# Altium PCB ATmega_3000.14.PcbDoc
Units mm, origin at the board's own origin, x right, y up, seen from the top; angles counter-clockwise.
Board outline 50.04 x 60.07 mm, 4 copper layers (Top Layer, Signal Layer 1, Signal Layer 2, Bottom Layer), stack 0.778 mm thick; 78 components, 59 nets, 264 pads, 69 vias.
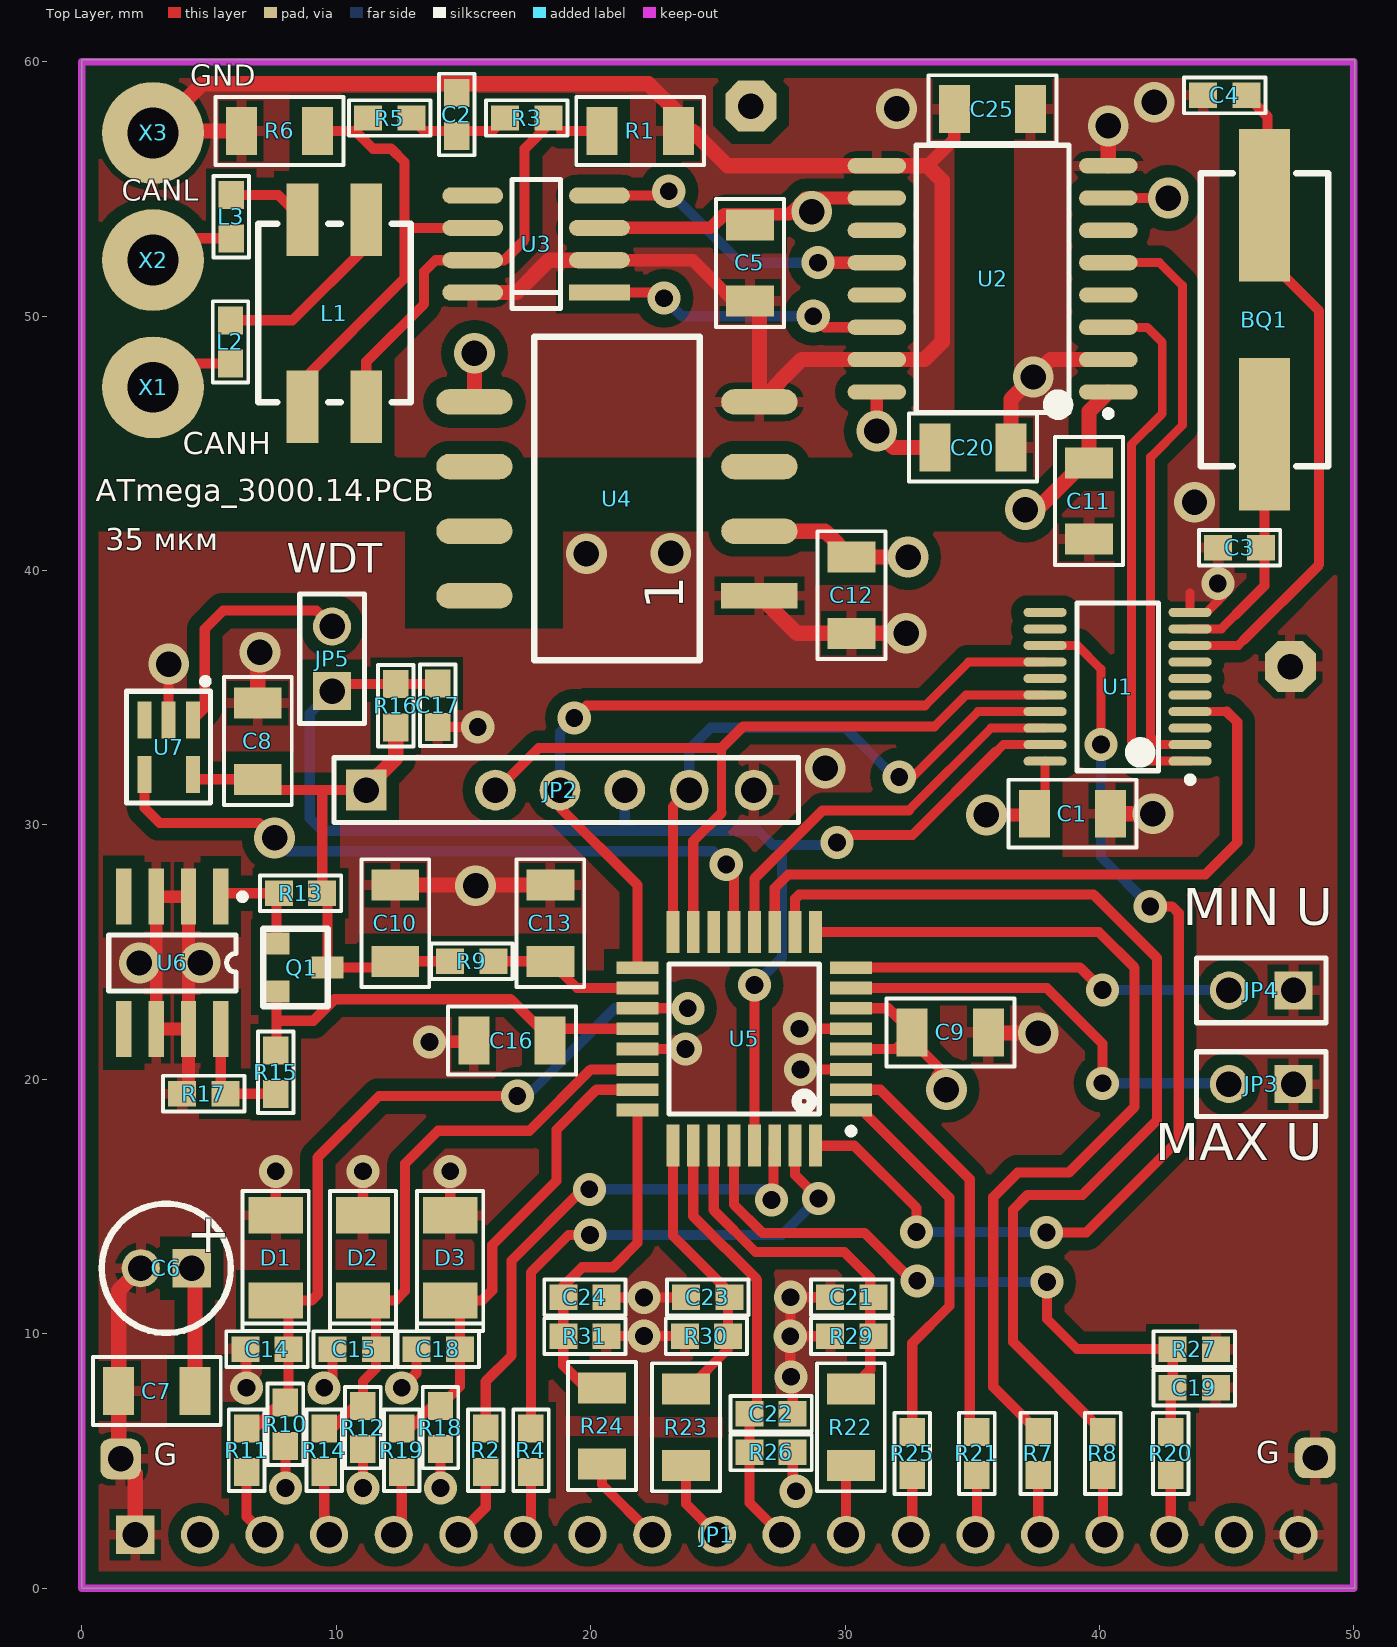
[diagram p0: Top Layer view]
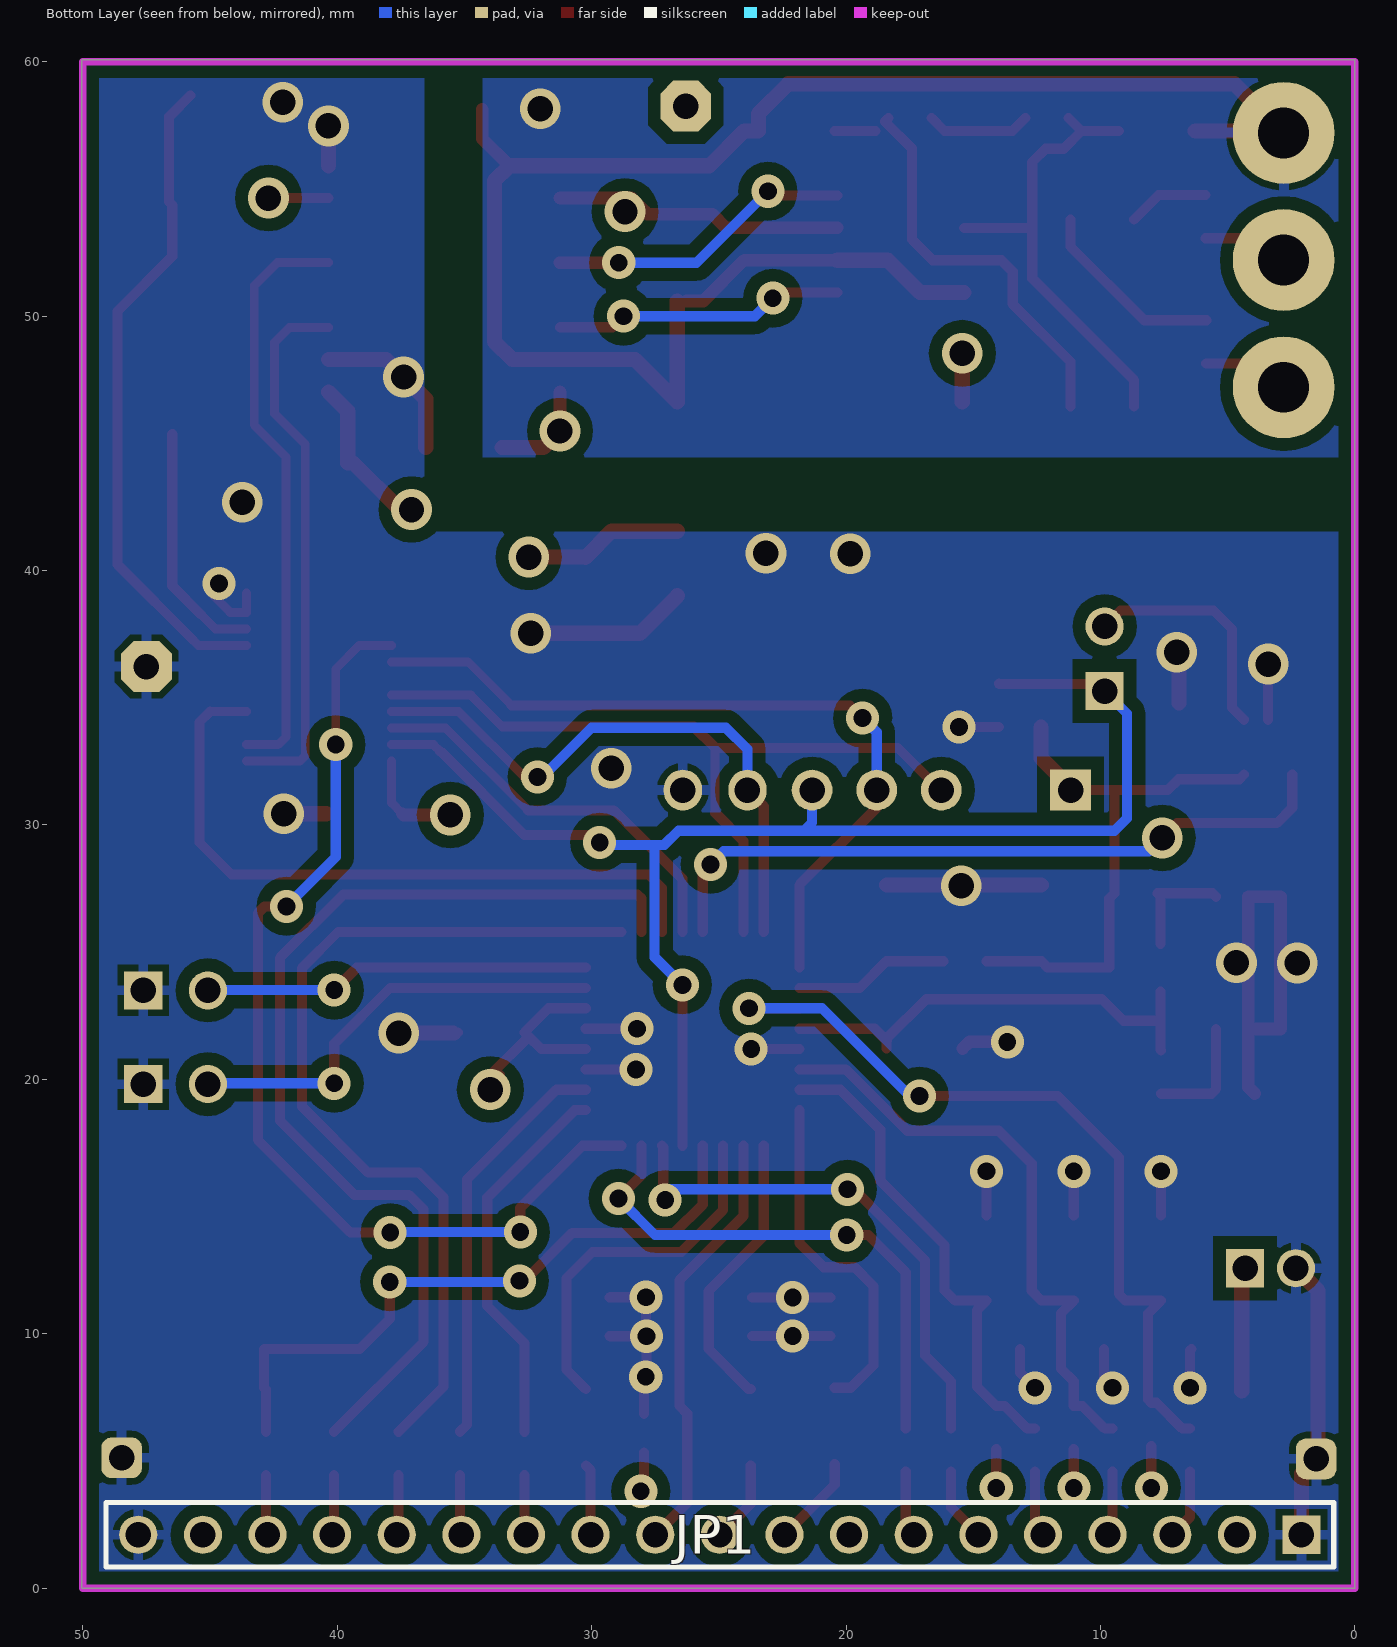
[diagram p1: Bottom Layer view, seen from below]
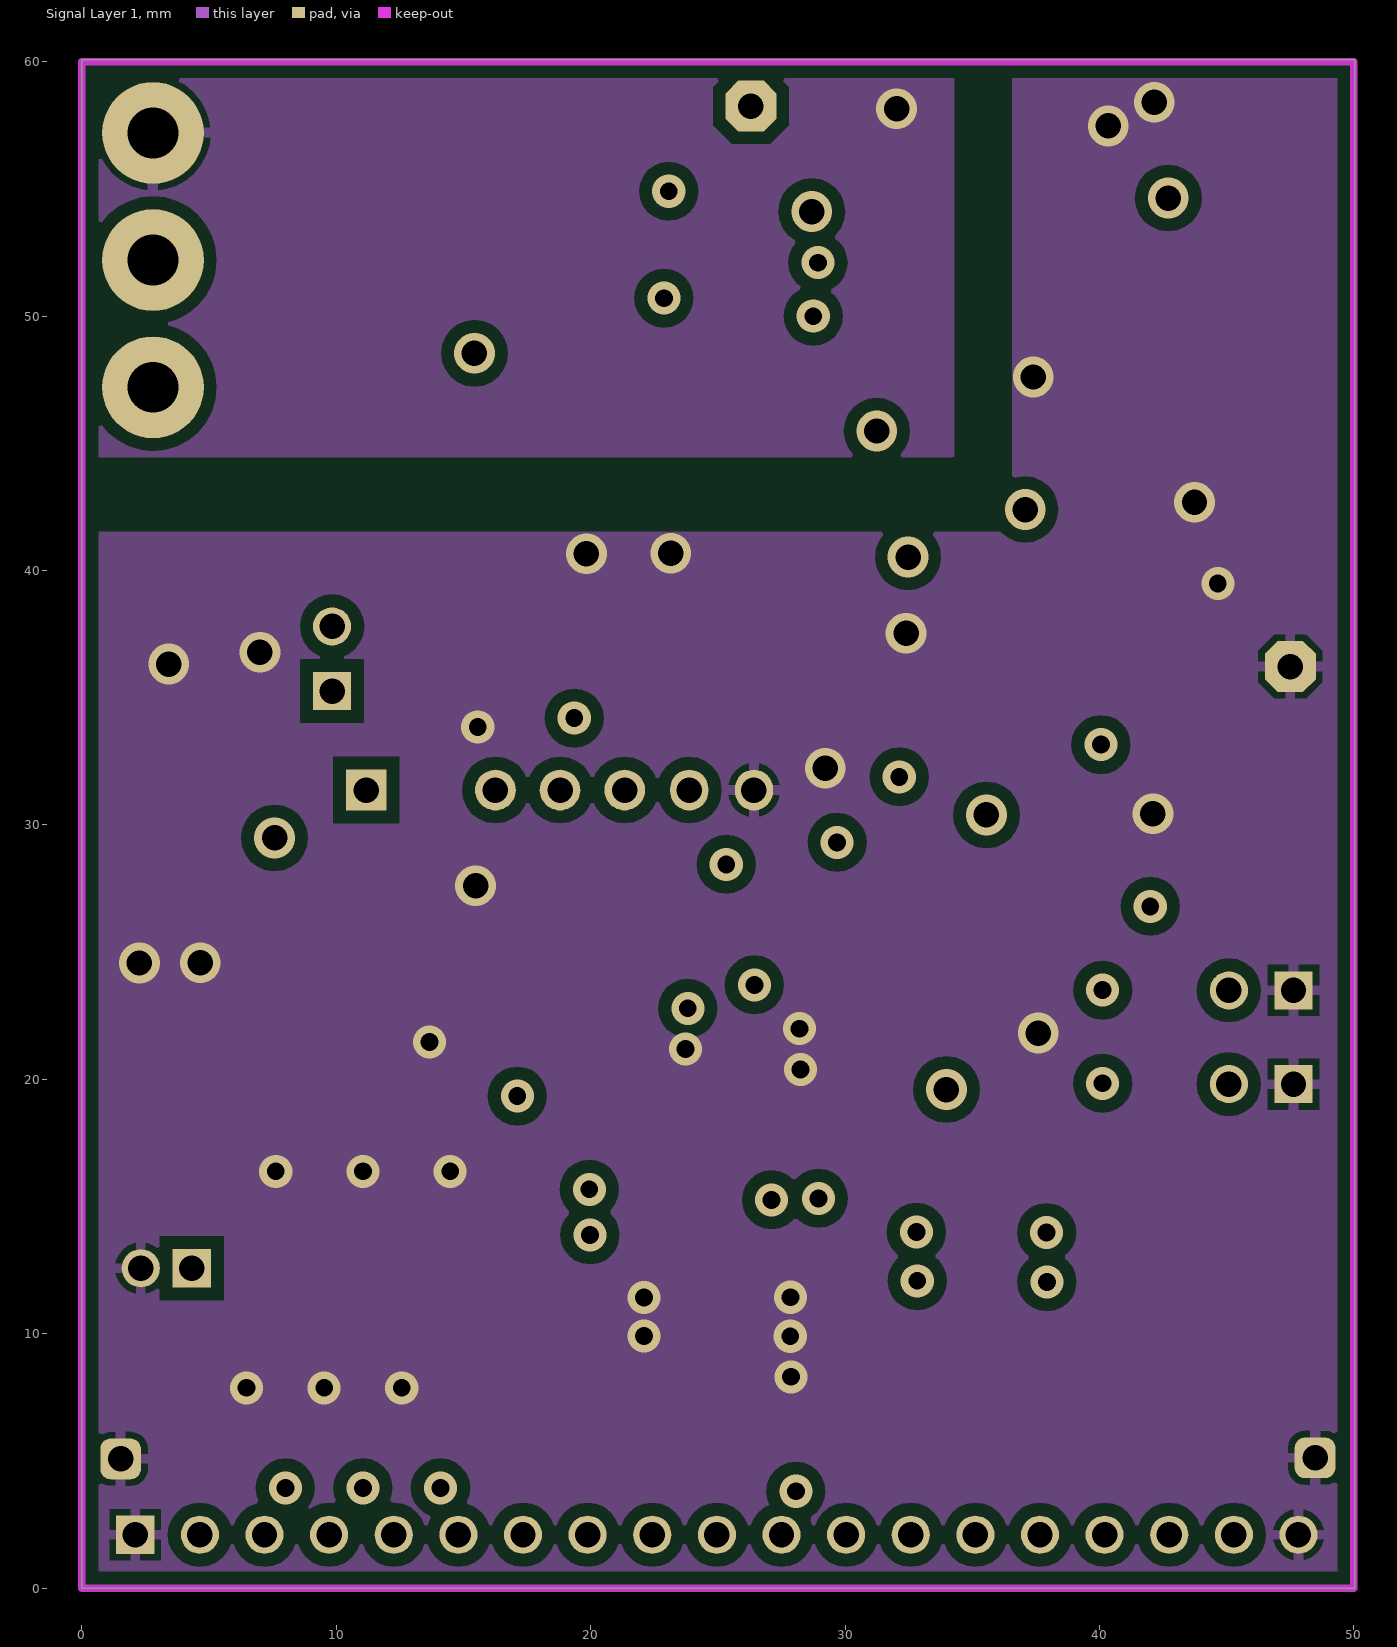
[diagram p2: Signal Layer 1]
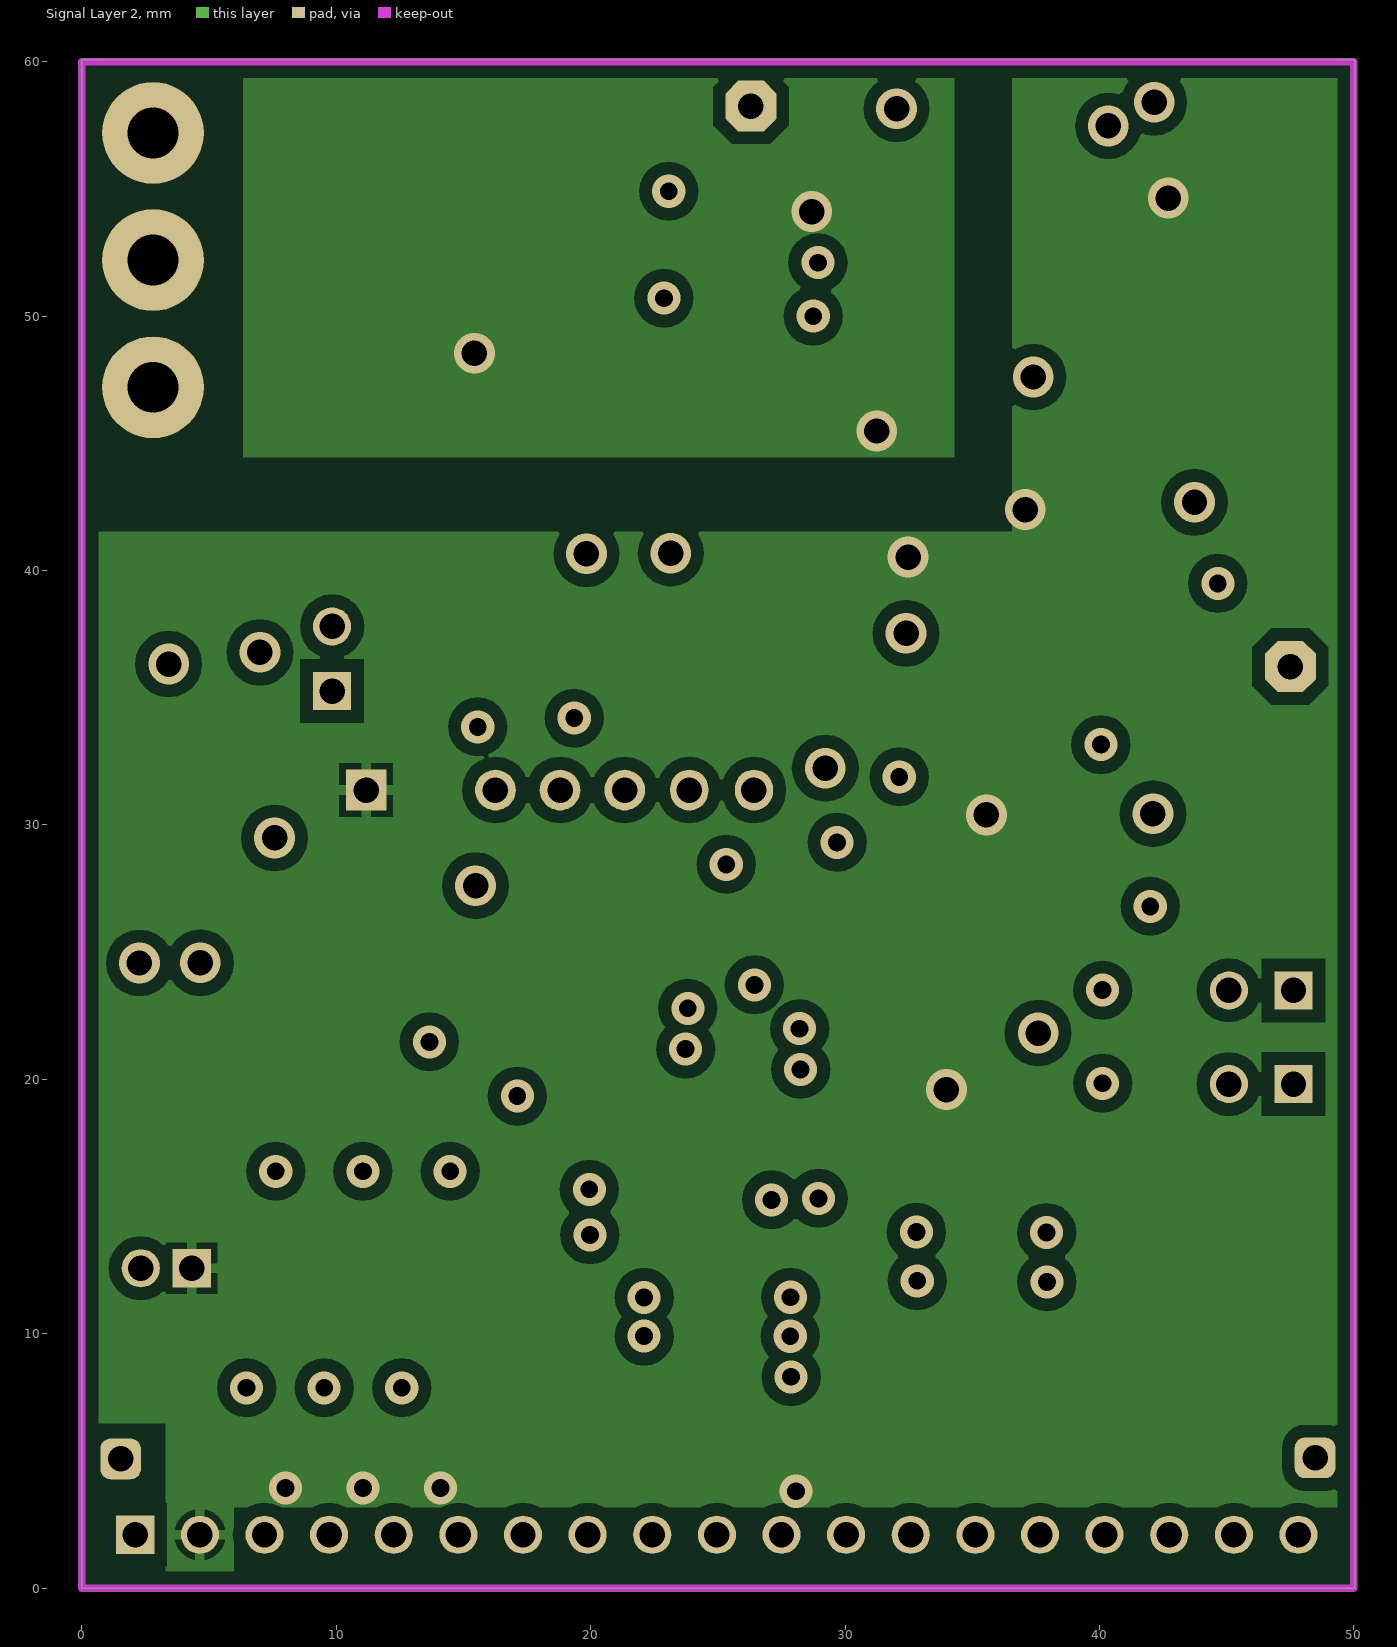
[diagram p3: Signal Layer 2]

## Layer stack, top to bottom
Top Solder: solder mask 0.0102, Solder Resist, Dk 3.5
Top Layer: signal copper 0.0356
Dielectric 1: core 0.254, FR-4, Dk 4.2
Signal Layer 1: signal copper 0.036
Dielectric 3: prepreg 0.127, Dk 4.2
Signal Layer 2: signal copper 0.036
Dielectric 2: core 0.254, Dk 4.2
Bottom Layer: signal copper 0.0356
Bottom Solder: solder mask 0.0102, Solder Resist, Dk 3.5

## Board outline
0,0 50.038,0 50.038,60.071 0,60.071

## Design rules (kind name [scope] priority, off if disabled: settings)
Clearance Polygon [All vs InPolygon] p1: gap=0.5 ignorepadtopadclearanceinfootprint=FALSE
Clearance keep [All] p2: gap=0.3 ignorepadtopadclearanceinfootprint=TRUE
Clearance "S2 Layer" [All vs OnLayer('Signal Layer 2')] p3: gap=0.4 ignorepadtopadclearanceinfootprint=TRUE
Clearance "S1 Layer" [All vs OnLayer('Signal Layer 1')] p4: gap=0.4 ignorepadtopadclearanceinfootprint=TRUE
Clearance [All] p5: gap=0.254 ignorepadtopadclearanceinfootprint=TRUE except(0: Arc-Hole Track-Hole SMDPad-Hole THPad-Hole Via-Hole Fill-Hole Poly-Hole Region-Hole Text-Hole)
Height [All] p1 off: minheight=0 maxheight=25.4 prefheight=12.7
HoleSize [All] p1: absolutevalues=TRUE maxlimit=10 minlimit=0.025 maxpercent=80.000 minpercent=20.000
MinimumSolderMaskSliver [All] p1: minsoldermaskwidth=0.1
PolygonConnect [All] p1: thpad.connectstyle=Relief thpad.reliefconductorwidth=0.4 thpad.reliefentries=4 thpad.polygonreliefangle="90 Angle" thpad.airgapwidth=0.254 smdpad.connectstyle=Relief smdpad.reliefconductorwidth=0.4 smdpad.reliefentries=4 smdpad.polygonreliefangle="90 Angle" smdpad.airgapwidth=0.254 via.connectstyle=Direct via.reliefconductorwidth=0.4 via.reliefentries=4 via.polygonreliefangle="90 Angle" via.airgapwidth=0.254
RoomDefinition "ПУ БПС3000 AtMega" [InComponentClass('ПУ БПС3000 AtMega')] p1 off: confinementstyle=ConfineIn formatcopy=TRUE lockcomponents=FALSE outline -49.403,-49.276 1.397,-49.276 1.397,-23.876 -49.403,-23.876
RoutingVias [All] p1: holewidth=1 width=1.5 viastyle="Through Hole" minholewidth=0.7 minwidth=1.3 maxholewidth=4 maxwidth=6
SilkToBoardRegionClearance [All] p1 off:
SilkToSilkClearance [All] p1 off: silktosilkclearance=0.254
SilkToSolderMaskClearance [IsPad] p1 off: minsilkscreentomaskgap=0.254 clearancetoexposedcopper=TRUE
SolderMaskExpansion Via [IsVia] p1: expansion=0.05
SolderMaskExpansion [All] p2: expansion=0.102
Width [All] p1: maxlimit=5 minlimit=0.254 preferedwidth=0.5
24 further rules are at their usual default settings.

## Components (designator, comment, footprint, x,y, rotation, side; value= is the part's Value field where it differs from the comment)
BQ1 "10МГц" HC-49SMD 46.482,49.856 r90 top
C1 "22.0" C_1206 40.434,30.439 r180 top value=1u
C2 "100n" 0603 14.739,57.923 r90 top value=1,0
C3 "10p" 0603 45.505,40.894 r0 top
C4 "10p" 0603 44.919,58.674 r0 top
C5 "22.0" _1206 26.259,53.587 r270 top value=1,0
C6 "22.0x50" C_5d_2pad 2.318,12.573 r0 top value=22,0
C7 "22.0" _1206 1.448,7.747 r0 top value=1,0
C8 "22.0" _1206 6.917,34.79 r270 top value=1,0
C9 "22.0" _1206 35.636,21.844 r180 top value=1,0
C10 "22.0" _1206 12.319,24.638 r90 top value=1,0
C11 "22.0" _1206 39.585,44.226 r270 top value=1,0
C12 "22.0" _1206 30.252,37.53 r90 top value=1,0
C13 "22.0" _1206 18.415,27.635 r270 top value=1,0
C14 "1u" 0603 7.278,9.398 r0 top value=1,0
C15 "1u" 0603 10.707,9.398 r0 top value=1,0
C16 "22.0" _1206 15.406,21.522 r0 top value=1,0
C17 "1u" 0603 13.991,34.701 r90 top value=1,0
C18 "1u" 0603 14.009,9.398 r0 top value=1,0
C19 "1u" 0603 43.727,7.874 r180 top value=1,0
C20 "1n 1000v" _1206 33.528,44.831 r0 top value=1,0
C21 "1u" 0603 30.265,11.43 r0 top value=1,0
C22 "1u" 0603 27.09,6.858 r180 top value=1,0
C23 "1u" 0603 24.599,11.43 r0 top value=1,0
C24 "1u" 0603 19.773,11.43 r180 top value=1,0
C25 "1n 1000v" _1206 34.295,58.133 r0 top value=1,0
D1 "C5v6" SM/D_1406 7.62,11.303 r90 top value=BZV55C5V6
D2 "C5v6" SM/D_1406 11.049,11.303 r90 top value=BZV55C5V6
D3 "C5v6" SM/D_1406 14.478,11.303 r90 top value=BZV55C5V6
JP1 "PLSR19" HDR1X19 2.1,2.1 r0 top locked
JP2 "PLSF-7" HDR1X7 11.176,31.369 r0 top
JP3 "JMP" HDR1X2#1 46.355,19.812 r180 top
JP4 "JMP" HDR1X2#1 46.355,23.495 r180 top
JP5 "PLS2" HDR1X2#2 9.836,35.261 r90 top
L1 "B82790C0475N265" B82790 9.927,50.12 r90 top
L2 "DR" 0603 5.842,48.983 r270 top value=BLM18AG121SN10
L3 "DR" 0603 5.875,53.906 r270 top value=BLM18AG121SN10
Q1 "BC847" SOT23 8.649,24.391 r270 top
R1 "CT1206K14G" 1206 20.447,57.277 r0 top
R2 "1K0" 0603 15.875,5.422 r90 top value=1K
R3 "680R" 0603 17.487,57.785 r180 top value=120
R4 "1K0" 0603 17.653,5.422 r90 top value=1K
R5 "680R" 0603 12.104,57.785 r180 top value=120
R6 "CT1206K14G" 1206 6.274,57.277 r0 top
R7 "100R" 0603 37.592,5.295 r270 top value=10K
R8 "100R" 0603 40.132,5.295 r270 top value=10K
R9 "100R" 0603 15.328,24.638 r0 top value=10K
R10 "1K0" 0603 8.001,6.438 r90 top value=10K
R11 "100R" 0603 6.477,5.422 r270 top
R12 "1K0" 0603 11.049,6.311 r90 top value=10K
R13 "1K0" 0603 8.597,27.312 r180 top value=1K
R14 "100R" 0603 9.525,5.422 r270 top
R15 "1K0" 0603 7.62,20.281 r90 top value=1K
R16 "10K" 0603 12.341,34.685 r90 top
R17 "1K8" 0603 4.787,19.438 r0 top value=1K
R18 "1K0" 0603 14.097,6.311 r90 top value=10K
R19 "100R" 0603 12.573,5.422 r270 top
R20 "2K0" 0603 42.799,5.295 r270 top value=1K
R21 "1R0" 0603 35.179,5.295 r270 top value=1K
R22 "33K" 1206 30.226,4.826 r90 top value=value
R23 "33K" 1206 23.749,4.826 r90 top value=value
R24 "100R" 1206 20.447,4.877 r90 top value=value
R25 "1R0" 0603 32.639,5.295 r270 top value=15K
R26 "2K0" 0603 27.09,5.334 r0 top value=1K
R27 "2K0" 0603 43.727,9.398 r180 top value=1K
R29 "1K5" 0603 30.265,9.906 r0 top value=1K
R30 "1K5" 0603 24.55,9.906 r0 top value=1K
R31 "" 0603 19.773,9.906 r180 top value=1K
U1 "MCP2515" TSSOP-ST20_N 40.711,35.429 r180 top
U2 "ISO7231" DW16_N 40.346,47.018 r180 top
U3 "TJA1050" SOIC-8-1.27-L.200 20.345,50.927 r90 top
U4 "SBT01L-05" SBT01L 26.631,39.006 r90 top
U5 "ATmega168A-AU" 32A_N 26.035,21.59 r180 top
U6 "TL431ACD" SO-G8 3.556,24.574 r180 top
U7 "TPS3823-50" SO-G5/P.95 4.36,34.13 r180 top value=TPS76333
X1 "" PIN2R#1 2.875,46.85 r0 top locked
X2 "" PIN2R#2 2.875,52.05 r0 top locked
X3 "" PIN2R#3 2.7,56.925 r0 top locked

## Footprints (in the part's own frame and the unit in brackets; to place one, negate y for a bottom-side part, rotate by r counter-clockwise, add the part's x,y. Pads: shape width x height; smd on the part's side, far side on the other; paste and mask are expansions set on the pad)
32A_N [mm] "Thin QFP, 32-Leads, Body 7x7mm, Pitch 0.8mm, IPC Medium Density"
  rect 1.65x0.5 smd mask+0.05: 1(-4.2,2.8) 2(-4.2,2) 3(-4.2,1.2) 4(-4.2,0.4) 5(-4.2,-0.4) 6(-4.2,-1.2) 7(-4.2,-2) 8(-4.2,-2.8) 17(4.2,-2.8) 18(4.2,-2) 19(4.2,-1.2) 20(4.2,-0.4) 21(4.2,0.4) 22(4.2,1.2) 23(4.2,2) 24(4.2,2.8)
  rect 0.5x1.65 smd mask+0.05: 9(-2.8,-4.2) 10(-2,-4.2) 11(-1.2,-4.2) 12(-0.4,-4.2) 13(0.4,-4.2) 14(1.2,-4.2) 15(2,-4.2) 16(2.8,-4.2) 25(2.8,4.2) 26(2,4.2) 27(1.2,4.2) 28(0.4,4.2) 29(-0.4,4.2) 30(-1.2,4.2) 31(-2,4.2) 32(-2.8,4.2)
  silkscreen extent -4.33,-2.95 2.95,3.75, body extent -3.5,-3.5 3.5,3.5, height 1.2
0603 [mm] "Chip Capacitor; Body 1.6 x 0.8 mm (LxW typ)"
  rect 1.1x1 smd: 1(-0.85,0) 2(0.85,0)
  silkscreen extent -1.6,-0.7 1.6,0.7
1206 [mil]
  rect 48x74 smd: 1(0,0) 2(118,0)
  silkscreen extent -40,-52 158,52
_1206 [mil]
  rect 48x74 smd: 1(0,0) 2(118,0)
  silkscreen extent -40,-53 158,53
B82790 [mm] "Фильтр EPCOS"
  rect 2.85x1.25 smd: 1(-3.675,-1.25) 2(-3.675,1.25) 3(3.675,1.25) 4(3.675,-1.25)
  silkscreen extent -3.5,-3 3.5,3
C_5d_2pad [mm]
  rect 1.5x1.5 hole 1: +(2,0)
  round 1.5 hole 1: -(0,0)
  silkscreen extent -1.54,-2.54 3.54,2.54
C_1206 [mil]
  rect 48x74 smd: 1(0,0) 2(118,0)
  silkscreen extent -40,-53 158,53
DW16_N [mm]
  oval 2.3x0.6 smd: 1(0,0) 2(0,-1.27) 3(0,-2.54) 4(0,-3.81) 5(0,-5.08) 6(0,-6.35) 7(0,-7.62) 8(0,-8.89) 9(9.1,-8.89) 10(9.1,-7.62) 11(9.1,-6.35) 12(9.1,-5.08) 13(9.1,-3.81) 14(9.1,-2.54) 15(9.1,-1.27) 16(9.1,0)
  silkscreen extent -0.13,-9.69 7.55,0.97, body extent 0.75,-9.69 8.34,0.8, height 2.64
HC-49SMD [mm]
  rect 6x2 smd: 1(-4.5,0) 2(4.5,0)
  silkscreen extent -5.75,-2.5 5.75,2.5
HDR1X2#1 [mm]
  rect 1.5x1.5 hole 1: 1(-1.27,0)
  round 1.5 hole 1: 2(1.27,0)
  silkscreen extent -2.54,-1.27 2.54,1.27
HDR1X2#2 [mm] "Connector; Header; 2 Position"
  rect 1.5x1.5 hole 1: 1(0,0)
  round 1.5 hole 1: 2(2.54,0)
  silkscreen extent -1.27,-1.27 3.81,1.27
HDR1X7 [mm]
  rect 1.6x1.6 hole 1: 1(0,0)
  round 1.6 hole 1: 3(5.08,0) 4(7.62,0) 5(10.16,0)
  oval 1.5x1.6 hole 1: 6(12.7,0) 7(15.24,0)
  silkscreen extent -1.27,-1.27 17,1.27
HDR1X19 [mm]
  rect 1.5x1.5 hole 1: 1(0,0)
  round 1.5 hole 1: 2(2.54,0) 3(5.08,0) 4(7.62,0) 5(10.16,0) 6(12.7,0) 7(15.24,0) 8(17.78,0) 9(20.32,0) 10(22.86,0) 11(25.4,0) 12(27.94,0) 13(30.48,0) 14(33.02,0) 15(35.56,0) 16(38.1,0) 17(40.64,0) 18(43.18,0) 19(45.72,0)
PIN2R#1 [mm]
  round 4 hole 2: 1(-0.075,0.35)
PIN2R#2 [mm]
  round 4 hole 2: 1(-0.075,0.15)
PIN2R#3 [mm]
  round 4 hole 2: 1(0.1,0.275)
SBT01L [mm] "Body7.5x15, pin2.54"
  rect 1x3 smd: 1(0,0)
  oval 1x3 smd: 2(2.54,0) 3(5.08,0) 4(7.62,0) 5(7.62,11.2) 6(5.08,11.2) 7(2.54,11.2) 8(0,11.2)
  silkscreen extent -2.54,2.35 10.18,8.85
SM/D_1406 [mil]
  rect 56x84 smd: +(132,0) -(0,0)
  silkscreen extent -47,-51 169,51
SO-G5/P.95 [mm]
  rect 0.55x1.45 smd: 1(0,0) 2(0.95,0) 3(1.9,0) 4(1.9,2.15) 5(0,2.15)
  silkscreen extent -0.7,-1.64 2.6,3.27
SO-G8 [mm]
  rect 0.6x2.2 smd: 1(-1.905,-2.604) 2(-0.635,-2.604) 3(0.635,-2.604) 4(1.905,-2.604) 5(1.905,2.596) 6(0.635,2.596) 7(-0.635,2.596) 8(-1.905,2.596)
  silkscreen extent -2.88,-2.73 2.5,1.1
SOIC-8-1.27-L.200 [mil]
  rect 25x94 smd: 1(0,0)
  oval 25x94 smd: 2(50,0) 3(100,0) 4(150,0) 5(150,196) 6(100,196) 7(50,196) 8(0,196)
  silkscreen extent -25,60 175,136
SOT23 [mil]
  rect 34x40 smd: 1(-37,-39.5) 3(37,-39.5)
  rect 34x50 smd: 2(0,39.5)
  silkscreen extent -60,-60 60,40
TSSOP-ST20_N [mm] "TSOP, 20-Leads, Body 6.5x4.4mm, Pitch 0.65mm, IPC Medium Density"
  oval 1.7x0.35 smd mask+0.05: 1(-2.85,2.925) 2(-2.85,2.275) 3(-2.85,1.625) 4(-2.85,0.975) 5(-2.85,0.325) 6(-2.85,-0.325) 7(-2.85,-0.975) 8(-2.85,-1.625) 9(-2.85,-2.275) 10(-2.85,-2.925) 11(2.85,-2.925) 12(2.85,-2.275) 13(2.85,-1.625) 14(2.85,-0.975) 15(2.85,-0.325) 16(2.85,0.325) 17(2.85,0.975) 18(2.85,1.625) 19(2.85,2.275) 20(2.85,2.925)
  silkscreen extent -2.98,-3.3 1.6,3.77, body extent -2.25,-3.3 2.25,3.3, height 1.2

## Part data
BQ1: library part BQ, Bottom=20, Right=20
C1 C3 C4: library part C_SM_1206
C2 C5 C7 C8 C9 C10 C11 C12 C13 C14 C15 C16 C17 C18 C19 C20 C21 C22 C23 C24 C25: library part "Cap Semi", "Capacitor (Semiconductor SIM Model)", Manufacturer="Generic Components", Class I=Passive, Class II=Capacitor, Published=8-Jun-2000, Publisher="Altium Limited", Revision="July-2002: Re-released for DXP Platform."
C6: library part "Cap Pol1", "Polarized Capacitor (Radial)", Manufacturer="Generic Components", Class I=Passive, Class II=Capacitor, Published=8-Jun-2000, Publisher="Altium Limited", Revision="July-2002: Re-released for DXP Platform."
D1 D2 D3: library part Zener, "Default Diode", Manufacturer="Generic Components", Class I=Discrete, Class II="Diode - Switching", Published=8-Jun-2000, Publisher="Altium Limited", Revision="July-2002: Re-released for DXP Platform."
JP1: library part "Header 19", "Header, 19-Pin", Manufacturer="Generic Components", Class I=Connector, Publisher="Altium Limited", Revision="July-2002: Re-released for DXP Platform."
JP5: library part "Header 2", "Header, 2-Pin", Manufacturer="Generic Components", Class I=Connector, Publisher="Altium Limited", Revision="July-2002: Re-released for DXP Platform."
L1: library part "Trans Cupl", "Transformer (Coupled Inductor Model)", LatestRevisionDate=17-Jul-2002, LatestRevisionNote="Re-released for DXP Platform.", PackageDescription="Transformer; 4 Leads", PackageReference=TRF_4, Published=8-Jun-2000, Publisher="Altium Limited"
L2 L3: "L"
Q1: library part BC847ALT1, "General Purpose Transistor NPN Silicon", Manufacturer=Motorola, Package Information="Latest Revision: 1997", Package Reference=318-08, Class I=Discrete, Class II="BJT - Low Power", Datasheet="Latest Revision: 1997", Published=29-Sep-2000, Publisher="Altium Limited", Revision="July-2002: Re-released for DXP Platform."
R1 R6: library part "Res Varistor", "Varistor (Voltage-Sensitive Resistor)", Manufacturer="Generic Components", Class I=Discrete, Class II="Voltage-Sensitive Resistor", Published=24-Mar-1999, Publisher="Altium Limited", Revision="July-2002: Re-released for DXP Platform."
R2 R3 R4 R5 R7 R8 R9 R10 R11 R12 R13 R14 R15 R16 R17 R18 R19 R20 R21 R25 R26 R27 R29 R30 R31: library part Res2, "Resistor", Manufacturer="Generic Components", Class I=Passive, Class II=Resistor, Published=8-Jun-2000, Publisher="Altium Limited", Revision="July-2002: Re-released for DXP Platform."
  R2 R4 R7 R8 R9 R10 R11 R12 R14 R16 R18 R19 R20 R21 R25 R26 R27 R29 R30 R31: Rule=Undefined
R22 R23 R24: library part R_1206
U1: "Stand-Alone CAN Controller With SPI Interface, 20-Pin TSSOP, Industrial Temperature", Code_JEDEC=MO-153-AC, ComponentLink1Description="Manufacturer URL", ComponentLink1URL=http://www.microchip.com/, ComponentLink2Description=Datasheet, ComponentLink2URL=http://ww1.microchip.com/downloads/en/DeviceDoc/21801f.pdf, ComponentLink3Description="Package Specification", ComponentLink3URL=http://www.microchip.com/stellent/groups/techpub_sg/documents/packagingspec/en012702.pdf, DatasheetVersion="revF, Oct-2010", PackageDescription="20-Lead Plastic Thin Shrink Small Outline (ST) - 4.4mm Body [TSSOP]", PackageReference=TSSOP-ST20, PackageVersion="revBB, Aug-2009"
U4: library part SBT01L
U5: "8-bit AVR Microcontroller, 16KB Flash, 512 Bytes EEPROM, 1KB SRAM, 32-pin TQFP, Industrial Grade (-40°C to 85°C)", Supplier Part Number 1=ATMEGA168A-AU-ND, Code_JEDEC=MS-026-ABA, ComponentLink1Description="Manufacturer Link", ComponentLink1URL=http://www.atmel.com/products/avr/default.asp?, ComponentLink2Description="ATmega48A/48PA/88A/88PA/168A/168PA/328/328P Datasheet", ComponentLink2URL=http://www.atmel.com/dyn/resources/prod_documents/8271.pdf, ComponentLink3Description="ATmega48A/48PA/88A/88PA/168A/168PA/328/328P Summary", ComponentLink3URL=http://www.atmel.com/dyn/resources/prod_documents/8271S.pdf, ComponentLink4Description="Atmel.com Home", ComponentLink4URL=http://www.atmel.com, DatasheetVersion="revA, Jan-2010", PackageDescription="32-Lead, 7x7x1.0 mm Body, 0.8mm Lead Pitch, Thin Profile Plastic Quad Flat Package (TQFP)", PackageReference=32A, PackageVersion="revB, Oct-2001", Published=1-Apr-2010, Publisher="Altium Limited", Supplier 1=Digi-Key, Supplier 2=Mouser, Supplier Part Number 2=556-ATMEGA168A-AU
U6: "Programmable Precision Reference", Manufacturer=Motorola, Package Reference=751-02, Class I="Power Management", Class II="Voltage Reference", Datasheet="Linear and Interface Integrated Circuits, DL128 Rev2 (1988)", Published=15-Apr-2002, Publisher="Altium Limited"
U7: library part TPS3823, "Reset IC", Manufacturer="National Semiconductor", Package Information="Latest Revision: Aug-1999", Package Reference=MA05B, Class I="Power Management", Class II="Voltage Regulator", Datasheet="Latest Revision: Oct-1999", Published=15-Apr-2002, Publisher="Altium Limited"
X1 X2 X3: library part Socket_Ring, "Socket", Manufacturer="Generic Components", Class I=Connector, Publisher="Altium Limited", Revision="July-2002: Re-released for DXP Platform."
JP2: Bottom=80, Right=20

## Free pads (board coordinates)
  oct 2x2 hole 1: 0(26.3,58.25) 1(47.5,36.225)
  rrect50% 1.6x1.6 hole 1: 1(1.524,5.08) 1(48.472,5.124)

## Via types
v1: diameter 1.3, hole 0.7, Top Layer to Bottom Layer, 44 vias
v2: diameter 1.6, hole 1, Top Layer to Bottom Layer, 25 vias

## Nets (pads, with @x,y where several pads share a name; then routed paths per layer and width w, separated by ;. In a path a pad name is that pad's centre, name@x,y a point inside that pad or via, vN(x,y) a via of type N, cw(c..) or ccw(c..) an arc to the next point about the centre after c; other vN are vias at no path point)
+5v: C1.2 C6.+ C7.2 C8.2 C9.2 C10.1 C11.1 C12.2 JP1.2 JP2.1 Q1.2 R9.1 R10.1 R12.1 R13.1 R16.1 R18.1 R26.2 U1.20 U2.1 U2.7 U4.2 U5.4 U5.6 U7.5 | length 60.7
  Top Layer w0.35: C1.2 37.861,30.863 U1.20
  Top Layer w0.4: U7.5 4.547,31.793 C8.2 ; C8.2@6.927,31.798 7.356,31.369 JP2.1@11.078,31.369 ; v1(8.001,3.937) R10.1 ; 9.447,31.346 R13.1 9.652,27.107 Q1.2 12.072,24.391 C10.1 R9.1 ; v1(11.049,3.937) R12.1 ; JP2.1@11.137,31.428 JP2.1@11.078,31.369 ; JP2.1 JP2.1@11.078,31.369 ; v1(14.097,3.937) R18.1 ; R26.2 27.94,3.937 v1(28.067,3.81) ; U5.4 31.985,21.19 C9.2@32.473,21.678 ; U5.6 31.693,22.79 C9.2 C9.2@32.473,21.678 ; v2@33.601,19.596 v2@33.601,20.168 ; v2@33.982,20.168 C9.2@32.473,21.678 ; U2.1 U2.1@40.372,46.992 ; U2.7 v2(42.704,54.638)
  Top Layer w0.5: v2(35.555,30.393) 37.391,30.393 C1.2
  Top Layer w0.6: C6.+ 4.445,12.446 C7.2 ; JP2.1@11.137,31.428 12.341,32.632 R16.1 ; U4.2 29.212,41.546 30.241,40.516 C12.2 v2(32.475,40.527) ; v2(37.08,42.396) 37.541,42.396 39.371,44.226 C11.1 39.585,46.258 U2.1
  Bottom Layer w0.4: v2(42.704,54.638) v2@42.794,54.549
  other v2: 33.982,19.596
adc0: C18.2 D3.- R18.2 R19.1 U5.23 | length 19.5
  Top Layer w0.4: R19.1 12.876,6.272 13.765,7.161 R18.2 14.859,7.923 C18.2 14.859,10.922 D3.- 15.719,11.303 16.129,11.713 16.129,13.485 18.656,16.012 18.656,18.021 20.225,19.59 U5.23
adc1: C24.2 R24.2 R31.2 U5.24 | length 13.8
  Top Layer w0.4: R24.2 19.812,7.874 18.923,8.763 R31.2 C24.2 18.923,11.871 19.663,12.611 20.881,12.611 21.835,13.565 U5.24
adc2: C23.2 R23.2 R30.2 U5.25 | length 11.2
  Top Layer w0.4: U5.25 23.235,13.849 25.4,11.684 R30.2 25.4,9.398 23.825,7.823 R23.2
adc3: C22.2 JP1.11 R26.1 U5.26 | length 17
  Top Layer w0.4: U5.26 24.035,14.624 26.543,12.116 26.543,7.161 C22.2 R26.1 26.24,3.36 JP1.11
adc4: C21.2 R22.2 R29.2 U5.27 | length 14.5
  Top Layer w0.4: U5.27 24.835,14.858 26.48,13.213 29.968,13.213 30.988,12.193 30.988,8.585 R22.2
adc5: C19.2 R20.1 R27.2 U5.28 | length 26.2
  Top Layer w0.4: U5.28 25.635,15.076 26.748,13.964 30.76,13.964 32.739,11.984 v1(32.836,12.081) ; v1(37.935,12.036) 37.935,10.578 39.115,9.398 R27.2 ; R20.1 42.799,7.796 C19.2 R27.2 ; R27.2@42.799,9.32 R27.2
  Bottom Layer w0.4: v1@32.859,12.002 32.893,12.036 v1(37.935,12.036)
adc6: C14.2 D1.- R10.2 R11.1 U5.19 | length 31.9
  Top Layer w0.4: R11.1 6.78,6.272 7.796,7.288 R10.2 8.128,7.415 C14.2 8.128,10.795 D1.- 9.017,11.303 9.271,11.557 9.271,16.933 11.681,19.343 v1(17.117,19.343) ; U5.19 v1(23.819,22.79)
  Bottom Layer w0.4: v1@17.498,19.343 20.946,22.79 v1(23.819,22.79)
adc7: C15.2 D2.- R12.2 R14.1 U5.22 | length 23.9
  Top Layer w0.4: R14.1 9.828,6.272 10.717,7.161 R12.2 11.049,8.128 11.557,8.636 C15.2 11.557,10.795 D2.- 12.319,11.303 12.7,11.684 12.7,16.679 13.997,17.976 17.595,17.976 20.009,20.39 U5.22
adc-0: JP1.17 R20.2 | length 2.4
  Top Layer w0.4: JP1.17 42.799,2.159 R20.2
bps_en: R21.1 U5.2 | length 16.2
  Top Layer w0.4: U5.2 31.386,19.59 34.9,16.077 34.9,6.424 R21.1
CS: U1.18 U5.12 | length 16
  Top Layer w0.35: 32.5,30.569 35.735,33.804 U1.18
  Top Layer w0.4: U5.12 26.435,27.88 29.124,30.569 32.5,30.569
GND: C1.1 C3.1 C4.1 C6.- C7.1 C8.1 C9.1 C10.2 C11.2 C12.1 C13.1 C14.1 C15.1 C16.1 C17.1 C18.1 C19.1 C20.2 C21.1 C22.1 C23.1 C24.1 C25.2 D1.+ D2.+ D3.+ JP1.1 JP1.19 JP2.7 JP3.1 JP4.1 pad.1 R17.1 R27.1 R29.1 R30.1 R31.1 U1.10 U2.2 U2.8 U4.1 U5.3 U5.5 U5.21 U6.2 U6.3 U6.6 U6.7 U7.2 | length 91.7
  Top Layer w0.35: 43.561,39.114 U1.10 44.213,38.354 v1@44.843,38.983
  Top Layer w0.4: C7.1 C7.1@1.524,7.671 ; U7.2 v2(3.41,36.321) ; C14.1 6.477,9.349 v1(6.477,7.874) ; D1.+ v1(7.62,16.383) ; v1(9.525,7.874) 9.857,8.206 C15.1 ; D2.+ v1(11.049,16.383) ; v1(12.573,7.874) 13.159,8.46 C18.1 ; C17.1 v1(15.561,33.851) ; D3.+ v1(14.478,16.383) ; R31.1 v1(22.098,9.906) R30.1 ; C24.1 v1(22.098,11.43) C23.1@23.7,11.43 ; U5.21 v1(23.73,21.19) ; C22.1 27.94,8.128 27.875,8.193 v1(27.875,8.307) 27.843,8.339 v1(27.843,9.902) ; v1(28.213,21.99) U5.5 ; v1(28.251,20.39) U5.3 ; R29.1@29.288,9.906 29.284,9.902 v1(27.843,9.902) ; C21.1@29.288,11.43 29.284,11.434 v1(27.859,11.434) 27.859,9.918 v1(27.843,9.902) ; C9.1@35.255,21.844 35.366,21.733 C9.1@35.451,21.818
  Top Layer w0.5: v2(2.265,24.571) v2@2.921,24.571 ; R17.1 4.191,19.692 U6.7 ; v2(4.657,24.578) v2@4.191,24.578 ; v1(13.663,21.471) 15.155,21.471 C16.1@15.418,21.209 ; v2@2.921,24.571 U6.3 U6.2 v2@4.191,24.578 ; v2@2.921,24.571 U6.6 U6.7 ; U6.7 v2@4.191,24.578
  Top Layer w0.6: JP1.1 2.1,4.504 1.524,5.08 1.448,5.156 C7.1 1.448,11.703 C6.- ; C8.1 6.917,36.7 v2(6.999,36.782) ; C10.2 C13.1 ; U4.1 28.107,37.53 C12.1 v2(32.398,37.53) ; C9.1@35.451,21.818 v2@37.207,21.818 ; C20.2 36.525,46.738 v2(37.394,47.606) 38.076,48.288 U2.2 ; U2.8 v2(40.346,57.475) ; C1.1 v2(42.099,30.439)
  other v1: 44.65,39.49
  other v2: 37.588,21.818 15.474,27.61 29.224,32.23 19.834,40.652 23.149,40.677 43.735,42.68 42.146,58.401
id0: JP1.3 R11.2 | length 2.8
  Top Layer w0.4: R11.2 6.477,2.803 JP1.3
id1: JP1.4 R14.2 | length 2.6
  Top Layer w0.4: R14.2 9.525,2.295 JP1.4
id2: JP1.5 R19.2 | length 2.6
  Top Layer w0.4: JP1.5 12.573,2.413 R19.2
in0: JP1.14 R21.2 | length 2.3
  Top Layer w0.4: JP1.14@35.179,2.159 R21.2
in1: JP1.13 R25.2 | length 2.3
  Top Layer w0.4: JP1.13@32.639,2.159 R25.2
in2: JP1.12 R22.1 | length 2.8
  Top Layer w0.4: JP1.12 30.04,4.64 R22.1
in4: JP1.10 R23.1 | length 3.2
  Top Layer w0.4: R23.1 23.749,3.311 JP1.10
in5: JP1.9 R24.1 | length 3.6
  Top Layer w0.4: R24.1 20.447,4.073 JP1.9
INT: U1.13 U5.32 | length 40.6
  Top Layer w0.35: U1.13 39.13,37.054 40.057,36.127 v1(40.057,33.158)
  Top Layer w0.4: U5.32 30.361,17.39 32.804,14.947 v1(32.804,13.995) ; v1(37.918,13.977) 39.482,13.977 43.118,17.613 43.118,26.528 42.846,26.799 v1(41.995,26.799)
  Bottom Layer w0.4: v1(32.804,13.995) v1@37.918,13.995 ; v1(40.057,33.158) 40.057,28.737 v1(41.995,26.799)
JP1: JP3.2 U5.7 | length 17.3
  Top Layer w0.4: U5.7 37.928,23.59 40.12,21.398 v1(40.12,19.844)
  Bottom Layer w0.4: v1(40.12,19.844) JP3.2@45.053,19.844
JP2: JP4.2 U5.8 | length 15.2
  Top Layer w0.4: U5.8 39.237,24.39 v1(40.12,23.507)
  Bottom Layer w0.4: v1@40.132,23.495 v1(40.12,23.507) 45.073,23.507 JP4.2
Led0: R2.2 U5.30 | length 20.5
  Top Layer w0.4: R2.2 15.875,8.128 16.891,9.144 16.891,12.878 19.69,15.677 v1(19.947,15.677) ; v1(27.109,15.261) 27.185,15.337 27.185,17.34 U5.30
  Bottom Layer w0.4: v1@20.328,15.677 26.978,15.677 27.109,15.545 v1(27.109,15.261)
Led1: R4.2 U5.31 | length 21.1
  Top Layer w0.4: R4.2 17.653,12.41 19.126,13.883 v1(19.973,13.883) ; U5.31 28.035,16.236 v1(28.95,15.321)
  Bottom Layer w0.4: v1(19.973,13.883) 27.512,13.883 v1(28.95,15.321)
MISO: JP2.6 U1.17 U5.16 | length 23.7
  Top Layer w0.35: v1(32.129,31.886) 32.656,31.886 35.225,34.454 U1.17
  Top Layer w0.4: U5.16 23.235,30.728 JP2.6
  Bottom Layer w0.4: JP2.6 23.876,32.974 24.722,33.82 30.005,33.82 31.94,31.886 v1(32.129,31.886)
MOSI: JP2.3 U1.16 U5.15 | length 30.8
  Top Layer w0.35: 25.146,30.48 25.146,33.02 ; 33.507,33.863 34.748,35.104 U1.16
  Top Layer w0.4: JP2.3 16.308,31.369 17.959,33.02 25.146,33.02 ; U5.15 24.035,29.369 25.146,30.48 ; 25.146,33.027 25.982,33.863 33.507,33.863
NetBQ1_1: BQ1.1 C3.2 U1.9 | length 9.6
  Top Layer w0.35: U1.9 44.792,37.704 45.361,38.273
  Top Layer w0.4: 45.361,38.273 46.482,39.394 BQ1.1
NetBQ1_2: BQ1.2 C4.2 U1.8 | length 26.1
  Top Layer w0.35: U1.8 45.457,37.054 45.691,37.288
  Top Layer w0.4: 45.691,37.288 48.632,40.229 48.632,50.199 46.482,52.35 BQ1.2 46.609,54.483 46.609,57.834 C4.2
NetC2_1: C2.1 R3.2 R5.1 | length 4.1
  Top Layer w0.4: R5.1 13.462,57.277 16.129,57.277 R3.2
NetC2_2: C2.2 C5.2 C25.1 R1.2 R6.1 U2.9 U2.15 U3.2 U3.8 U4.4 X3.1 | length 70.5
  Top Layer w0.5: U3.2 24.006,52.197 25.613,50.59 C5.2 ; 33.194,55.865 33.236,55.906 34.295,56.965 C25.1
  Top Layer w0.6: X3.1 X3.1@2.877,57.277 ; R6.1 X3.1@2.877,57.277 ; U3.8 17.095,50.927 18.365,52.197 U3.2 ; C5.2@26.631,50.59 U4.4 28.294,48.288 U2.15 33.117,48.288 33.816,48.987 33.816,55.326 33.236,55.906 33.233,55.908 U2.9 25.374,55.908 24.005,57.277 R1.2 23.444,57.959 22.273,59.13 4.73,59.13 X3.1@2.877,57.277
  other v2: 32.024,58.147
NetC5_1: C5.1 C20.1 U2.10 U2.16 U3.3 U4.5 | length 18.2
  Top Layer w0.5: U3.3 24.714,53.467 25.25,54.003 27.802,54.003 v2@27.907,54.109 ; v2(28.69,54.109) v2@27.907,54.109 ; v2(31.246,45.484) U2.16 ; U2.10 28.437,54.638 v2@27.907,54.109
  Top Layer w0.6: U4.5 v2(15.431,48.536) ; v2(31.246,45.484) 31.898,44.831 C20.1
NetC13_2: C13.2 R9.2 U5.18 | length 6.1
  Top Layer w0.4: R9.2 C13.2 19.463,23.59 U5.18
NetJP1_6: JP1.6 R2.1 | length 2.9
  Top Layer w0.4: JP1.6 15.875,3.175 R2.1
NetJP1_7: JP1.7 R4.1 | length 2.6
  Top Layer w0.4: JP1.7 17.653,2.413 R4.1
NetJP1_15: JP1.15 R7.2 | length 2.3
  Top Layer w0.4: JP1.15@37.592,2.168 R7.2
NetJP1_16: JP1.16 R8.2 | length 2.3
  Top Layer w0.4: JP1.16@40.132,2.168 R8.2
NetJP5_2: JP5.2 U7.1 | length 9.3
  Top Layer w0.4: U7.1 4.832,34.601 4.832,37.703 5.555,38.426 9.212,38.426 JP5.2
NetL1_1: L1.1 R1.1 R3.1 U3.7 | length 17.6
  Top Layer w0.4: L1.1 11.177,48.201 13.446,50.47 13.446,51.741 13.902,52.197 U3.7 16.598,52.197 17.405,53.004 17.405,56.576 18.476,57.646 R3.1 ; 18.845,57.277 R1.1
NetL1_2: L1.2 R5.2 R6.2 U3.6 | length 18.6
  Top Layer w0.4: L1.2 8.677,47.482 12.681,51.486 12.681,56.053 12.155,56.579 11.444,56.579 10.746,57.277 ; R6.2 10.746,57.277 ; R5.2 10.746,57.277 ; 12.689,53.467 U3.6
NetL1_3: L1.3 L3.1 | length 3.2
  Top Layer w0.4: L3.1 7.716,54.756 L1.3
NetL1_4: L1.4 L2.1 | length 7.6
  Top Layer w0.4: L2.1 8.28,49.833 11.177,52.731 L1.4
NetL2_2: L2.2 X1.1 | length 4.4
  Top Layer w0.4: X1.1 X1.1@2.844,47.244 ; X1.1@3.843,47.244 X1.1@2.844,47.244 ; L2.2 3.733,48.133 X1.1@2.844,47.244
NetL3_2: L3.2 X2.1 | length 3.9
  Top Layer w0.4: X2.1 X2.1@3.559,52.959 ; X2.1@3.994,52.959 X2.1@3.559,52.959 ; L3.2 3.656,53.056 X2.1@3.559,52.959
NetQ1_1: Q1.1 R13.2 U6.1 | length 4.4
  Top Layer w0.4: U6.1 5.595,27.312 R13.2 7.645,27.21 Q1.1
NetR15_1: R15.1 R17.2 U6.8 | length 4.6
  Top Layer w0.4: U6.8 5.461,19.614 R17.2 5.644,19.431 R15.1
NetU2_12: U2.12 U3.4 | length 12.1
  Top Layer w0.4: U3.4 22.901,54.737 v1(23.07,54.906)
  Top Layer w0.5: v1(28.935,52.098) U2.12
  Bottom Layer w0.4: v1(23.07,54.906) 25.877,52.098 v1(28.935,52.098)
NetU2_14: U2.14 U3.1 | length 11.5
  Top Layer w0.4: U3.1 22.654,50.927 v1(22.878,50.702) ; v1(28.748,49.995) 29.184,49.558 U2.14
  Bottom Layer w0.4: v1(22.878,50.702) 23.586,49.995 v1(28.748,49.995)
pwm: R25.1 U5.1 | length 15.1
  Top Layer w0.4: U5.1 30.662,18.79 34.106,15.346 34.106,11.091 32.639,9.624 R25.1
pwm0: R7.1 U5.9 | length 35.6
  Top Layer w0.4: U5.9 39.97,25.79 41.379,24.381 41.379,18.92 38.79,16.331 36.784,16.331 35.823,15.371 35.823,7.914 R7.1
pwm1: R8.1 U5.10 | length 40.3
  Top Layer w0.4: U5.10 28.035,27.098 28.198,27.261 39.768,27.261 42.256,24.774 42.256,18.38 39.333,15.457 37.178,15.457 36.604,14.883 36.604,9.673 R8.1
RST: C17.2 JP2.5 JP5.1 R16.2 U1.19 U5.29 | length 54.8
  Top Layer w0.35: 35.955,32.89 36.219,33.154 U1.19
  Top Layer w0.4: JP5.1 10.11,35.535 R16.2 13.975,35.535 C17.2 ; U5.29 v1(26.435,23.712) ; v1(29.685,29.313) 29.594,29.313 29.884,29.604 32.651,29.604 35.937,32.89 35.955,32.89
  Bottom Layer w0.4: JP5.1 8.956,34.381 8.956,30.265 9.45,29.77 21.655,29.77 ; JP2.5 21.336,30.09 21.655,29.77 ; v1(26.435,23.712) 27.525,24.801 27.525,29.215 ; v1(29.685,29.313) 29.587,29.215 27.525,29.215 ; 21.655,29.77 26.588,29.77 27.144,29.215 27.525,29.215
RXCAN: U1.2 U2.5 | length 23.2
  Top Layer w0.35: U2.5 42.357,52.098 43.261,51.194 43.261,45.711 42.009,44.459 42.009,33.463 42.318,33.154 U1.2
SCK: JP2.4 U1.14 U5.17 | length 30.7
  Top Layer w0.35: 33.142,34.692 34.854,36.404 U1.14
  Top Layer w0.4: JP2.4 18.796,30.681 21.835,27.642 U5.17 ; v1(19.353,34.197) 19.848,34.692 33.142,34.692
  Bottom Layer w0.4: JP2.4 18.796,33.64 v1(19.353,34.197)
TXCAN: U1.1 U2.3 | length 21.5
  Top Layer w0.35: U2.3 41.869,49.558 42.464,48.964 42.464,46.168 41.258,44.962 41.258,32.712 41.467,32.504 U1.1
TXCAN_GO: U1.4 U5.11 | length 27.4
  Top Layer w0.35: U1.4 45.004,34.454
  Top Layer w0.4: U5.11 27.235,27.518 27.767,28.05 44.155,28.05 45.414,29.309 45.414,34.044 45.004,34.454
Uref: C16.2 Q1.3 R15.2 U5.20 | length 18.1
  Top Layer w0.4: R15.2 7.645,21.156 7.645,22.304 ; Q1.3 7.645,22.304 ; C16.2 C16.2@18.415,21.534 ; C16.2@18.415,21.209 C16.2@18.415,21.534 ; U5.20 18.871,21.99 C16.2@18.415,21.534 ; 7.645,22.304 9.096,22.304 9.942,23.15 16.855,23.15 18.415,21.59 C16.2@18.415,21.534
WDI: U5.13 U7.4 | length 27.9
  Top Layer w0.4: U7.4 2.46,30.672 3.057,30.075 6.985,30.075 v2(7.574,29.486) ; v1(25.329,28.448) 25.635,28.142 U5.13
  Bottom Layer w0.4: v2(7.574,29.486) 8.095,28.966 24.812,28.966 v1(25.329,28.448)
pads on no net: JP1.8 JP1.18 U1.3 U1.5 U1.6 U1.7 U1.11 U1.12 U1.15 U2.4 U2.6 U2.11 U2.13 U3.5 U4.3 U4.6 U4.7 U4.8 U5.14 U6.4 U6.5 U7.3

## Polygon pours and split planes (outlines as drawn)
GND on Top Layer "GND" (solid, remove dead copper, pour order 0): 0.075,-0.006 50.113,-0.006 50.113,59.938 36.651,59.938 36.651,41.523 0.075,41.523
NetC2_2 on Top Layer "GND_CAN" (solid, remove dead copper, pour order 2): 0,44.45 34.29,44.45 34.29,59.944 0,59.944
NetC2_2 on Signal Layer 1 "GND_CAN" (solid, remove dead copper, pour order 4): 0,44.45 34.163,44.45 34.29,44.323 34.29,60.071 0.127,60.071 0,59.944
GND on Signal Layer 1 "GND" (solid, remove dead copper, pour order 6): 0,0 50.038,0 50.038,59.944 36.576,59.944 36.576,41.529 0,41.529
NetC5_1 on Signal Layer 2 "+5v_CAN" (solid, remove dead copper, pour order 10): 6.35,44.45 6.35,60.071 34.163,60.071 34.29,59.944 34.29,44.45
+5v on Signal Layer 2 "+5v" (solid, remove dead copper, pour order 8): 0,0 50.038,0 50.038,59.944 36.576,59.944 36.576,41.529 0,41.529
NetC2_2 on Bottom Layer "GND_CAN" (solid, remove dead copper, pour order 14): 0,44.45 34.29,44.45 34.29,60.071 -0.127,60.071
GND on Bottom Layer "GND" (solid, remove dead copper, pour order 12): 0,0 50.038,0 50.038,59.944 36.576,59.944 36.576,41.529 0,41.529

## Keep-outs
Keep-Out Layer:
  lines w0.3: 0,0 50,0 50,60 0,60 0,0

## Other copper
Top Layer:
  pour cut-out: 12.7,41.91 12.7,37.719 18.923,37.719 18.923,41.91
  pour cut-out: 44.704,59.944 44.704,41.529 50.038,41.529 50.038,59.962 50,60
  pour cut-out: 38.545,28.575 38.545,29.21 38.1,29.21 38.1,28.575
Signal Layer 2:
  pour cut-out: 49.911,0.127 49.911,3.175 5.969,3.175 5.969,0
  pour cut-out: 3.302,0 3.302,6.477 0,6.477 0,0

## Silkscreen, mask and mechanical layers (free items; w line width, h text height)
Top Overlay:
  text "GND" at 4.263,58.783 h1.4
  text "CANL" at 1.578,54.267 h1.4
  text "CANH" at 3.962,44.281 h1.5
  text "ATmega_3000.14.PCB" at 0.537,42.423 h1.5
  text "35 мкм" at 0.913,40.501 h1.5
  text "WDT" at 8.054,39.526 h2
  text "MIN U" at 43.267,25.556 h2.5
  text "MAX U" at 42.192,16.321 h2.5
  text "G" at 46.154,4.621 h1.5
  text "G" at 2.82,4.544 h1.5
Mechanical 1:
  text "GND" at 2.375,-7.275 h1.52 r90
  text "GND" at 48.525,-7.35 h1.52 r90
  text "+5v" at 5.207,-7.493 h1.52 r90
  text "pwm1" at 40.7,-7.825 h1.52 r90
  text "canl" at 45.55,-7.825 h1.52 r90
  text "led1" at 18.175,-7.875 h1.52 r90
  text "adr1" at 10.4,-7.975 h1.52 r90
  text "led0" at 15.625,-8.15 h1.52 r90
  text "adr2" at 12.925,-8.25 h1.52 r90
  text "adr0" at 7.975,-8.3 h1.52 r90
  text "pwm0" at 38.175,-8.35 h1.52 r90
  text "canh" at 43.3,-8.35 h1.52 r90
  text "anin1" at 33.15,-9 h1.52 r90
  text "anin4" at 25.725,-9.45 h1.52 r90
  text "anin5" at 23.225,-9.5 h1.52 r90
  text "anin3" at 28.3,-9.5 h1.52 r90
  text "anin0" at 35.75,-9.5 h1.52 r90
  text "anin2" at 30.625,-9.55 h1.52 r90

## Dimensions
2.1,2.1 to 47.5,36.225 on Mechanical 1
47.82,2.1 to 47.5,36.225 on Mechanical 1
26.3,58.25 to 2.1,2.1 on Mechanical 1
2.1,2.1 to 26.3,58.25 on Mechanical 1
0,60 to 50,60 on Mechanical 1
0,0 to 0,60 on Mechanical 1

## Text inside footprints (layer, text, board x,y; h text height)
C6: Top Overlay "+" at 4.096,13.208 h1.52
U4: Top Overlay "1" at 23.631,38.456 h1.52 r90